# Altium PCB Sub_Unit_1st.PcbDoc
Units mil, origin at the board's own origin, x right, y up, seen from the top; angles counter-clockwise.
Board outline 2770 x 1670 mil, 2 copper layers (Top Layer, Bottom Layer); 43 components, 20 nets, 119 pads, 0 vias.
Unrouted connection lines stored in the file: 90.
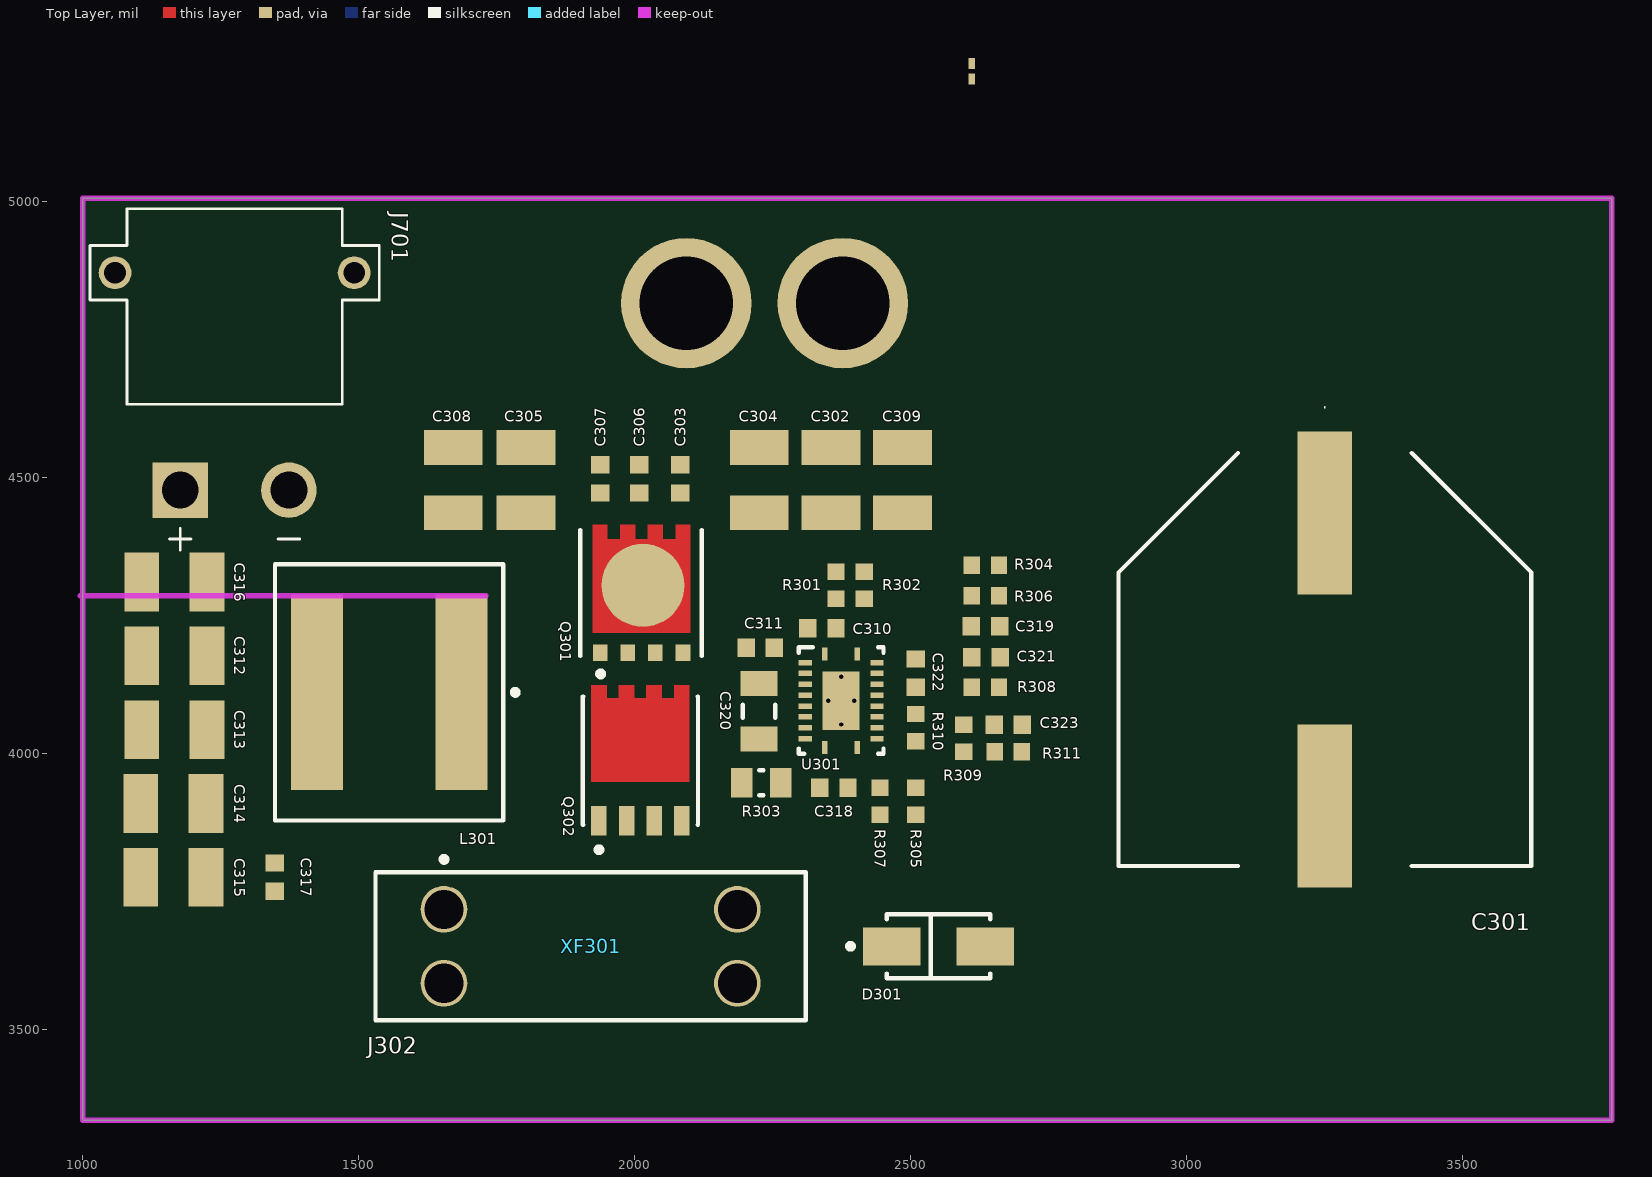
[diagram p0: Top Layer view]
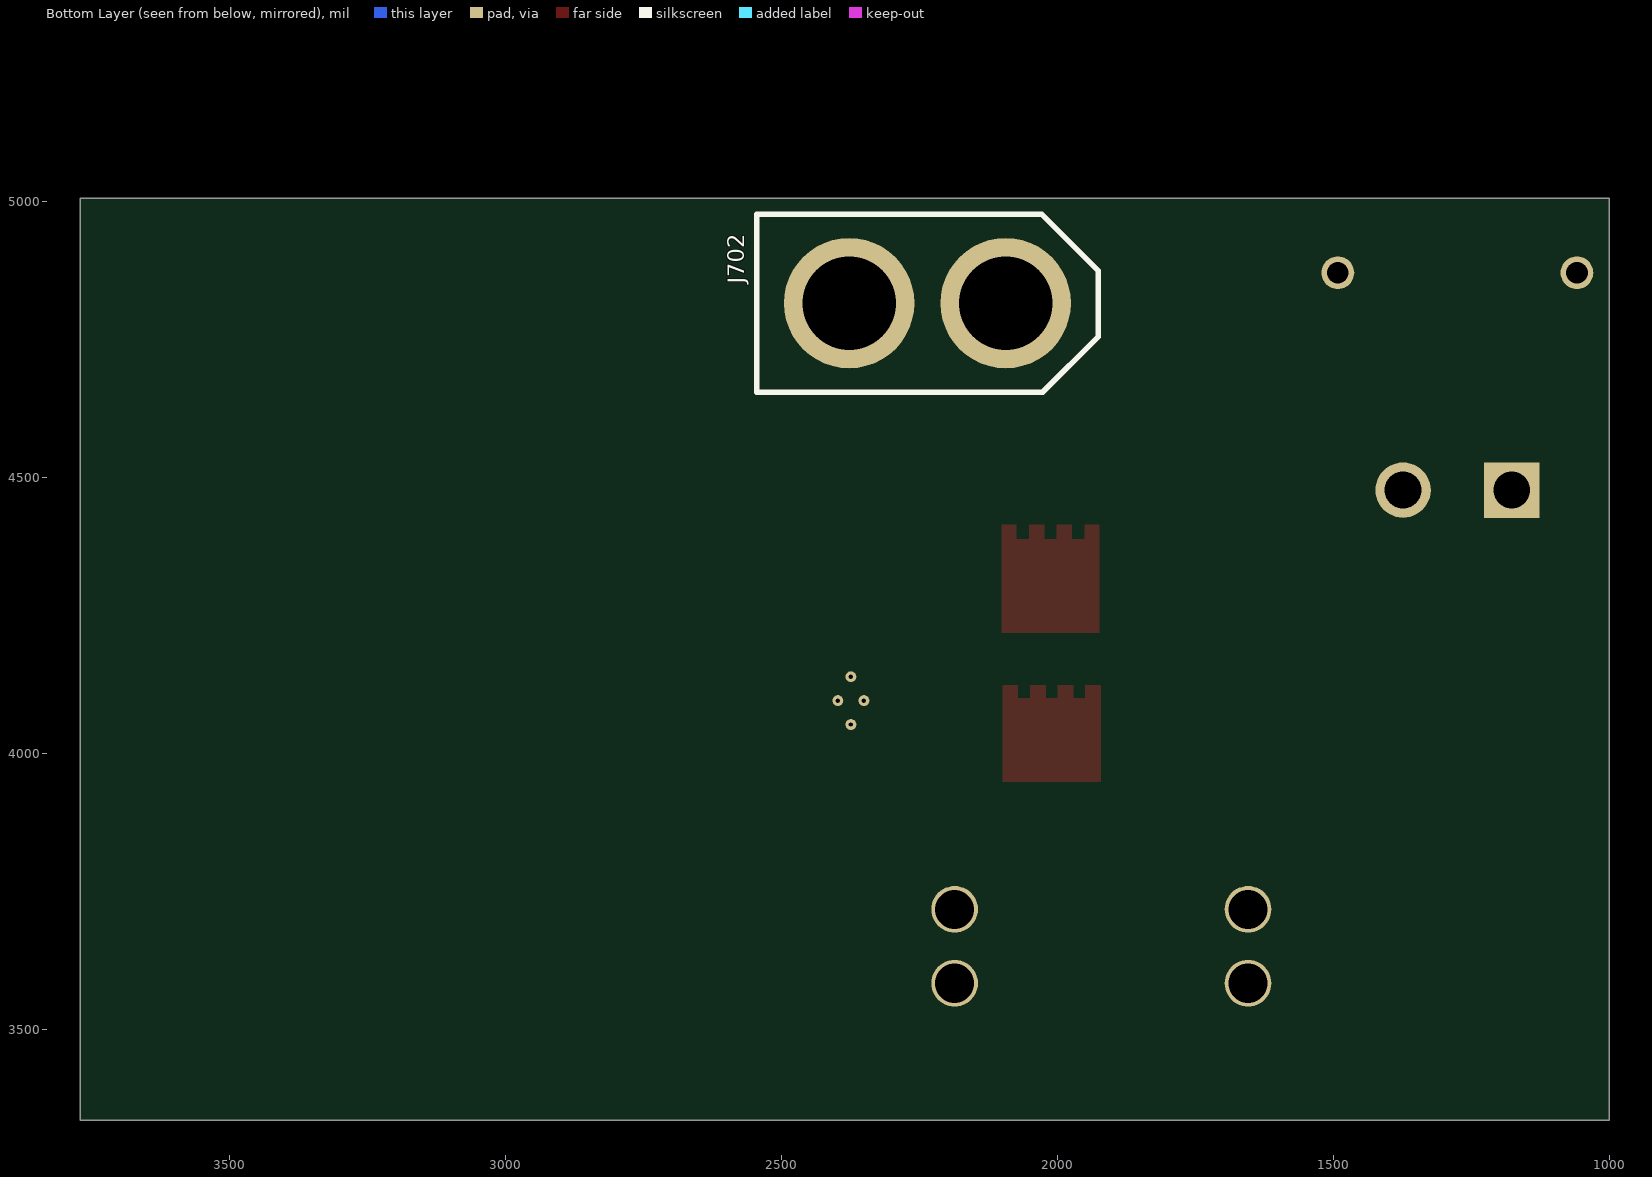
[diagram p1: Bottom Layer view, seen from below]

## Layer stack, top to bottom
Top Solder: solder mask 0.4, Solder Resist, Dk 3.5
Top Layer: signal copper 1.4
Dielectric 1: dielectric 12.6, FR-4, Dk 4.8
Bottom Layer: signal copper 1.4
Bottom Solder: solder mask 0.4, Solder Resist, Dk 3.5

## Board outline
1000,3335 3770,3335 3770,5005 1000,5005

## Design rules (kind name [scope] priority, off if disabled: settings)
Clearance [All] p1: gap=10 ignorepadtopadclearanceinfootprint=FALSE
PolygonConnect [All] p1: connectstyle=Relief reliefconductorwidth=10 reliefentries=4 polygonreliefangle="90 Angle" airgapwidth=10
RoutingVias [All] p1: holewidth=28 width=50 viastyle="Through Hole" minholewidth=28 minwidth=50 maxholewidth=28 maxwidth=50
SolderMaskExpansion [All] p1: expansion=4 istentingtop=FALSE
SupplyNets "Schematic Supply Nets_2" [InNet('PGND')] p1: voltage=0.000
SupplyNets "Schematic Supply Nets_1" [InNet('AGND')] p2: voltage=0.000
Width [All] p1: maxlimit=10 minlimit=10 preferedwidth=10
30 further rules are at their usual default settings.

## Classes and differential pairs
component class Connector: J701 J702

## Components (designator, comment, footprint, x,y, rotation, side; value= is the part's Value field where it differs from the comment)
C301 "220µF" EEEFK0J103SM 3250,4169.47 r270 top
C302 "non-polar_Capacitor" 1210 2355.28,4494.27 r270 top
C303 "non-polar_Capacitor" 0603#1 2082.66,4496.67 r270 top
C304 "non-polar_Capacitor" 1210 2225.28,4494.27 r270 top
C305 "non-polar_Capacitor" 1210 1802.8,4494.27 r270 top
C306 "non-polar_Capacitor" 0603#1 2007.66,4496.67 r270 top
C307 "non-polar_Capacitor" 0603#1 1937.66,4496.67 r270 top
C308 "non-polar_Capacitor" 1210 1670.91,4494.27 r270 top
C309 "non-polar_Capacitor" 1210 2484.96,4494.27 r270 top
C310 "non-polar_Capacitor" 0603#1 2338.86,4226.14 r180 top
C311 "non-polar_Capacitor" 0603#1 2227.09,4191.12 r180 top
C312 "non-polar_Capacitor" 1210 1165.94,4176.22 r0 top
C313 "non-polar_Capacitor" 1210 1165.94,4042.43 r0 top
C314 "non-polar_Capacitor" 1210 1164.06,3908.65 r0 top
C315 "non-polar_Capacitor" 1210 1164.06,3774.86 r0 top
C316 "non-polar_Capacitor" 1210 1165.94,4310 r0 top
C317 "non-polar_Capacitor" 0603#1 1347.86,3775.21 r90 top
C318 "non-polar_Capacitor" 0603#1 2360.51,3937.28 r180 top
C319 "non-polar_Capacitor" 0603#1 2635.16,4230 r0 top
C320 "non-polar_Capacitor" 1206 2225.08,4075.48 r90 top
C321 "non-polar_Capacitor" 0603#1 2636.14,4173.7 r0 top
C322 "non-polar_Capacitor" 0603#1 2509.02,4144.88 r90 top
C323 "non-polar_Capacitor" 0603#1 2676.3,4051.38 r0 top
D301 "SS14" FP-403AE-MFG 2550,3650 r180 top
J302 "2way" 2way_LP 2610,5235 r270 top net-tie
J701 "XT30PW-M" AMASS_XT30PW-M 1275,4870 r0 top
J702 "XT_60M" XT60_M 2235,4815 r0 bottom
L301 "XAL1010" FP-XAL1010-MFG 1555,4110 r180 top
Q301 "CSD19534Q5A" FP-DQJ0008A-MFG 2012.12,4290 r90 top
Q302 "CSD19532Q5B" FP-DNK0008A-MFG 2010,3986.34 r90 top
R301 "Resistor" 0603#2 2364.45,4303.87 r90 top
R302 "Resistor" 0603#2 2415.63,4303.87 r90 top
R303 "Resistor" 0805 2229.02,3946.14 r0 top
R304 "Resistor" 0603#2 2635.16,4340 r0 top
R305 "Resistor" 0603#2 2509.02,3912.68 r90 top
R306 "Resistor" 0603#2 2635.16,4285 r0 top
R307 "Resistor" 0603#2 2444.02,3912.68 r270 top
R308 "Resistor" 0603#2 2635.16,4119.29 r180 top
R309 "Resistor" 0603#2 2595.71,4026.77 r90 top
R310 "Resistor" 0603#2 2509.02,4046.15 r270 top
R311 "Resistor" 0603#2 2676.3,4002.17 r180 top
U301 "LM5146QRGYTQ1" RGY0020B 2373.62,4095 r0 top
XF301 "3557-2" KSTN-3557-2 1920,3650 r0 top

## Footprints (in the part's own frame and the unit in brackets; to place one, negate y for a bottom-side part, rotate by r counter-clockwise, add the part's x,y. Pads: shape width x height; smd on the part's side, far side on the other; paste and mask are expansions set on the pad)
2way_LP [mil] "2 way low power net tie junction"
  rrect5% 20x12 smd paste-100: 1(-14,0) 2(14,0)
0603#1 [mm]
  rect 0.8x0.85 smd: 1(-0.65,0) 2(0.65,0)
  body extent -0.85,-0.45 0.85,0.45, height 1
0603#2 [mm]
  rect 0.75x0.8 smd: 1(-0.625,0) 2(0.625,0)
  body extent -0.85,-0.45 0.85,0.45, height 0.55
0805 [mm] "SMD_Resistor"
  rect 1x1.35 smd: 1(-0.9,0) 2(0.9,0)
  silkscreen extent -0.1,-0.58 0.1,0.58, body extent -1.05,-0.67 1.05,0.67, height 0.55
1206 [mm]
  rect 1.15x1.7 smd: 1(-1.275,0) 2(1.275,0)
  silkscreen extent -0.3,-0.75 0.3,0.75, body extent -1.7,-0.9 1.7,0.9, height 1.8
1210 [mm]
  rect 1.6x2.7 smd: 1(-1.5,0) 2(1.5,0)
  body extent -1.75,-1.4 1.75,1.4, height 2.8
AMASS_XT30PW-M [mm]
  round 2.55 hole 1.7: N(2.5,-10)
  rect 2.55x2.55 / inner round 2.55 / far side rect 2.55x2.55 hole 1.7: P(-2.5,-10)
  round 1.508 hole 1: S1(5.5,0) S2(-5.5,0)
  silkscreen extent -6.65,-12.75 6.65,2.95, body extent -6.65,-11 6.65,2.95, height 5
EEEFK0J103SM [mm]
  rect 7.5x2.5 smd: 1(-6.75,0) 2(6.75,0)
  silkscreen extent -11.63,-9.5 9.5,9.5, body extent -10.2,-9.5 10.2,9.5, height 16.5
FP-403AE-MFG [mm]
  rect 2.65x1.75 smd paste+0 mask+0: 1(-2.15,0) 2(2.15,0)
  silkscreen extent -2.37,-1.48 4.17,1.48, body extent -2.6,-1.36 2.6,1.36, height 2.5
FP-DNK0008A-MFG [mm]
  rect 1.372x0.71 smd paste-1000 mask+0: 1(-2.77,1.905) 2(-2.77,0.635) 3(-2.77,-0.635) 4(-2.77,-1.905)
  round 0.025 smd paste-2.22: 5-6-7-8(1.236,0)
  Top Layer region: -0.984,-2.26 3.456,-2.26 3.456,-1.55 2.866,-1.55 2.866,-0.99 3.456,-0.99 3.456,-0.28 2.866,-0.28 2.866,0.28 3.456,0.28 3.456,0.99 2.866,0.99 2.866,1.55 3.456,1.55 3.456,2.26 -0.984,2.26
  silkscreen extent -4.22,-2.65 2.95,2.65, body extent -3,-2.5 3,2.5, height 1.05
FP-DQJ0008A-MFG [mm]
  rect 0.75x0.675 smd paste-1000 mask+0: 1(-2.752,1.905) 2(-2.752,0.635) 3(-2.752,-0.635) 4(-2.752,-1.905)
  round 3.821 smd paste-1000 mask+0: 5-6-7-8(0.35,-0.07)
  Top Layer region: -1.823,2.242 3.127,2.242 3.127,1.568 2.472,1.568 2.472,0.972 3.127,0.972 3.127,0.298 2.472,0.298 2.472,-0.298 3.127,-0.298 3.127,-0.972 2.472,-0.972 2.472,-1.568 3.127,-1.568 3.127,-2.242 -1.823,-2.242 -1.823,2.242
  silkscreen extent -3.85,-2.78 2.9,2.82, body extent -3,-2.7 3,2.7, height 1.07
FP-XAL1010-MFG [mm]
  rect 2.38x9 smd paste+0 mask+0: 1(-3.325,0) 2(3.325,0)
  silkscreen extent -5.93,-5.9 5.25,5.9, body extent -5,-5.65 5,5.65, height 10.01
KSTN-3557-2 [mm] "Fuse Holder, PCB Mount, Thru-Hole, Body 19.8x6.8mm, Height 7.4mm"
  round 2.15 hole 1.8: 1(-6.75,1.7) 2(-6.75,-1.7) 3(6.75,1.7) 4(6.75,-1.7)
  silkscreen extent -9.9,-3.4 9.9,4.12, body extent -9.91,-3.37 9.91,3.37, height 7.74
RGY0020B [mm]
  rect 0.25x0.6 smd paste+0 mask+0: 1(-0.75,2.15) 10(-0.75,-2.15) 11(0.75,-2.15) 20(0.75,2.15)
  rect 0.6x0.25 smd paste+0 mask+0: 2(-1.65,1.75) 3(-1.65,1.25) 4(-1.65,0.75) 5(-1.65,0.25) 6(-1.65,-0.25) 7(-1.65,-0.75) 8(-1.65,-1.25) 9(-1.65,-1.75) 12(1.65,-1.75) 13(1.65,-1.25) 14(1.65,-0.75) 15(1.65,-0.25) 16(1.65,0.25) 17(1.65,0.75) 18(1.65,1.25) 19(1.65,1.75)
  rect 1.7x2.7 smd paste-1.337 mask+0: 21(0,0)
  round 0.5 hole 0.203 paste-2539.97 mask+0: V(-0.6,0) V(0,-1.1) V(0,1.1) V(0.6,0)
  silkscreen extent -1.95,-2.45 1.95,2.45
XT60_M [mm]
  round 6 hole 4.3: 1(-3.6,0) 2(3.6,0)
  silkscreen extent -7.85,-4.1 7.85,4.1, body extent -7.8,-4 7.8,4, height 16.4

## Part data
C301: library part EEV-FK2A221M, "Capacitor Polarised", Manufacturer_Name=Panasonic, Mouser Part Number=667-EEV-FK2A221M, Arrow Part Number=EEV-FK2A221M, Arrow Price/Stock=https://www.arrow.com/en/products/eevfk2a221m/panasonic?utm_currency=USD&region=nac, Datasheet Link=http://industrial.panasonic.com/cdbs/www-data/pdf/RDE0000/ABA0000C1181.pdf, Height=17mm, Manufacturer_Part_Number=EEV-FK2A221M, Mouser Price/Stock=https://www.mouser.co.uk/ProductDetail/Panasonic/EEV-FK2A221M?qs=f%252BPvLx1Hi0lum2kXFW5X7Q%3D%3D
C302: library part CMP-024-000020-16, "SMD type ceramic capacitor", Capacitance=4.7µF, Voltage=100V, Design Item ID=Capacitor, Source=robit_passive.SchLib
C303 C317: library part CMP-024-000020-16, "SMD type ceramic capacitor", Capacitance=100nF, Voltage=100V, Design Item ID=Capacitor, Source=robit_passive.SchLib
C304 C305 C306 C308 C309 C320: library part CMP-024-000020-16, "SMD type ceramic capacitor", Capacitance=2.2µF, Voltage=50V, Design Item ID=Capacitor, Source=robit_passive.SchLib
C307 C310 C311: library part CMP-024-000020-16, "SMD type ceramic capacitor", Capacitance=100nF, Voltage=50V, Design Item ID=Capacitor, Source=robit_passive.SchLib
C312 C313 C314 C315 C316: library part CMP-024-000020-16, "SMD type ceramic capacitor", Capacitance=22µF, Voltage=50V, Design Item ID=Capacitor, Source=robit_passive.SchLib
C318: library part CMP-024-000020-16, "SMD type ceramic capacitor", Capacitance=15pF, Voltage=50V, Design Item ID=Capacitor, Source=robit_passive.SchLib
C319: library part CMP-024-000020-16, "SMD type ceramic capacitor", Capacitance=56nF, Voltage=50V, Design Item ID=Capacitor, Source=robit_passive.SchLib
C321: library part CMP-024-000020-16, "SMD type ceramic capacitor", Capacitance=4.7nF, Voltage=50V, Design Item ID=Capacitor, Source=robit_passive.SchLib
C322: library part CMP-024-000020-16, "SMD type ceramic capacitor", Capacitance=330pF, Voltage=50V, Design Item ID=Capacitor, Source=robit_passive.SchLib
C323: library part CMP-024-000020-16, "SMD type ceramic capacitor", Capacitance=470pF, Voltage=50V, Design Item ID=Capacitor, Source=robit_passive.SchLib
D301: library part CMP-2000-04943-2, "DIODE SCHOTTKY 40V 1A SMA", Forward Current=1A, Manufacturer="ON Semiconductor", Max Junction Temp=+125°C, Max Repetitive Reverse Voltage=40V, Max Surge Forward Current=40A, Package=403AE, Peak Reverse Current=0.2mA, Temperature="-65°C to +125°C", Temperature Range Low=-65°C, Automotive=No, Category=Diode, ComponentLink2Description=Datasheet, ComponentLink2URL=https://www.onsemi.com/pub/Collateral/SS19-D.PDF, Device Class L1="Discrete Semiconductors", Device Class L2=Diodes, Device Class L3="Schottky Diodes", Digikey Description="DIODE SCHOTTKY 40V 1A SMA", Height=2.5mm, Lead Free=Yes, Manufacturer Part Number=SS14, Mouser Description="Schottky Diodes & Rectifiers SMA 40V 1.0A", Octopart=https://octopart.com/ss14-on+semiconductor-29205033, RoHS=TRUE, Standoff Height=0.05mm, Temperature Range High=+125°C
J302: library part CMP-187-000000-1, "2 way net tie junction", Component Type="Net Tie", ComponentLink1Description=Source, ComponentLink1URL=http://www.edatools.cz/addons, Design Item ID=2way, FootprintNote="LP=12mil, MP=40mil, HP=120mil", Pin Count=2, Source=NetTie.SchLib
J701: library part CMP-019-000079-2, "Socket; DC supply; XT30; male; PIN: 2; on PCBs; THT; Colour: yellow", Package=None, Check_prices=https://www.snapeda.com/parts/XT30PW-M/AMASS/view-part/?ref=eda, Component Type=Standard, Design Item ID=XT30PW-M, MF=AMASS, MP=XT30PW-M, Pin Count=2, SnapEDA_Link=https://www.snapeda.com/parts/XT30PW-M/AMASS/view-part/?ref=snap, Source=XT30PW-M.SchLib, System=Connector
J702: library part CMP-019-000042-2, "XT_60 Connector MALE", Design Item ID=XT_60M, Source=robit_connector.SchLib, System=Connector
L301: library part CMP-028-000007-1, "General Purpose Inductor, 5.6uH, 20%, 1 Element, Composite-Core, SMD, 4539", Inductance=6.8µH
Q301: library part CMP-04962-000018-1, "MOSFET N-CH 100V 50 8SON", Continuous Drain Current=10A, Drain to Source Breakdown Voltage=100V, Drain to Source Resistance=12.6mΩ, Gate To Source Voltage=20V, Input Capacitace At Vds="1290pF @ 50V", Manufacturer="Texas Instruments", Max Forward Diode Voltage=1V, Max Junction Temp=+150°C, Package=DQJ0008A, Power Dissipation=3.2W, Pulse Drain Current=137A, Temperature="-55°C to +150°C", Temperature Range Low=-55°C, Typ Forward Diode Voltage=0.8V, Automotive=No, Category=Trans, ComponentLink2Description=Datasheet, ComponentLink2URL=http://www.ti.com/lit/ds/symlink/csd19534q5a.pdf, Depletion Mode=False, Device Class L1="Discrete Semiconductors", Device Class L2=Transistors, Device Class L3=MOSFETs, Digikey Description="MOSFET N-CH 100V 50 8SON", Drain To Source Voltage=100V, Gate Charge At Vgs="17nC @ 10V", Height=1.1mm, Lead Free=Yes, Manufacturer Part Number=CSD19534Q5A, Mouser Description="MOSFET N-Channel MOSFET", Number of Channels=1, Number Of N Channels=1, Octopart=https://octopart.com/csd19534q5a-texas+instruments-46749514, Reverse Recovery Charge=134nC, Reverse Recovery Time=53ns, RoHS=TRUE, Rthja Max=50°C/W, Temperature Range High=+150°C, Threshold Vgs Max=3.4V, Threshold Vgs Min=2.4V, Transconductance=47S, Turn Off Delay Time=20ns, Turn On Delay Time=9ns
Q302: library part CMP-00003-1, "100-V, N channel NexFET™ power MOSFET, single SON 5 mm x 6 mm, 4.9 mOhm 8-VSON-CLIP -55 to 150", Continuous Drain Current (ID)=100A, Drain to Source Breakdown Voltage=100V, Drain to Source Resistance=4.6mΩ, Gate to Source Voltage (Vgs)=20V, Input Capacitance=4.81nF, Manufacturer Lifecycle Status=ACTIVE, Max Junction Temperature (Tj)=150°C, Max Power Dissipation=3.1W, Min Operating Temperature=-55°C, Threshold Voltage=2.6V, Contact Plating=Tin, Drain to Source Voltage (Vdss)=100V, Element Configuration=Single, Fall Time=6ns, Height=0m, Lead Free="Contains Lead", Length=5mm, Lifecycle Status=Production, Max Operating Temperature=150°C, Mounting Technology="Surface Mount", Number of Channels=1, Number of Elements=1, Packaging=Digi-Reel®, Pins=8, Power Dissipation=3.1W, Rds On Max=4.9mΩ, REACH SVHC=No, Rise Time=6ns, RoHS=Compliant, Schedule B="8541290080, 8541290080", Thickness=950µm, Turn-Off Delay Time=22ns, Turn-On Delay Time=7ns, Width=5mm
R301: library part CMP-029-000004-8, "SMD type resistor", Resistance=2.1, Design Item ID=Resistor, Source=robit_passive.SchLib
R302: library part CMP-029-000004-8, "SMD type resistor", Resistance=200k, Design Item ID=Resistor, Source=robit_passive.SchLib
R303: library part CMP-029-000004-8, "SMD type resistor", Resistance=442, Design Item ID=Resistor, Source=robit_passive.SchLib
R304: library part CMP-029-000004-8, "SMD type resistor", Resistance=7.32k, Design Item ID=Resistor, Source=robit_passive.SchLib
R305: library part CMP-029-000004-8, "SMD type resistor", Resistance=0, Design Item ID=Resistor, Source=robit_passive.SchLib
R306: library part CMP-029-000004-8, "SMD type resistor", Resistance=24.9k, Design Item ID=Resistor, Source=robit_passive.SchLib
R307: library part CMP-029-000004-8, "SMD type resistor", Resistance=20k, Design Item ID=Resistor, Source=robit_passive.SchLib
R308: library part CMP-029-000004-8, "SMD type resistor", Resistance=2.67k, Design Item ID=Resistor, Source=robit_passive.SchLib
R309: library part CMP-029-000004-8, "SMD type resistor", Resistance=17.8k, Design Item ID=Resistor, Source=robit_passive.SchLib
R310: library part CMP-029-000004-8, "SMD type resistor", Resistance=1.27k, Design Item ID=Resistor, Source=robit_passive.SchLib
R311: library part CMP-029-000004-8, "SMD type resistor", Resistance=48.7, Design Item ID=Resistor, Source=robit_passive.SchLib
U301: "Automotive 100-V synchronous buck DC/DC controller with wide duty-cycle range 20-VQFN -40 to 150", Manufacturer_Name="Texas Instruments", Copyright="Copyright (C) 2026 Ultra Librarian. All rights reserved.", Manufacturer_Part_Number=LM5146QRGYTQ1, RefDes=RefDes, Type=TYPE
XF301: library part CMP-2000-05461-1, "FUSE HOLDER, PCB MOUNT, 500VAC, 20A, ROHS", Current Rating=30A, Manufacturer=Keystone-Electronics, Voltage=500V, Category=CircuitProtection, Contact Finish=TinNickel, Contact Material=Brass, Datasheet URL=http://datasheet.octopart.com/3557-2-Keystone-datasheet-15715937.pdf, Datasheet Version=Apr-13, Family=Fuseholders, For Use With/Related Products=ATC,ATO257,MINI897, Fuse Size="0.43\"Lx0.15\"Wx0.64\"H(10.92mmx3.81mmx16.25mm)", Fuse Type=Blade, Fuseholder Type=Block, Manufacturer URL=http://www.keyelco.com/, Mounting Type=PCB, Number of Circuits=1, Orientation=Vertical, Series=-, Termination Style=PCPin

## Nets (pads, with @x,y where several pads share a name; then routed paths per layer and width w, separated by ;. In a path a pad name is that pad's centre, name@x,y a point inside that pad or via, vN(x,y) a via of type N, cw(c..) or ccw(c..) an arc to the next point about the centre after c; other vN are vias at no path point)
12V_OUT: C312.2 C313.2 C314.2 C315.2 C316.2 C317.2 D301.1 J701.P L301.2 R309.1 R311.1 XF301.1 XF301.2 XF301.3 XF301.4
AGND: C319.1 J302.2 R304.1 R306.1 R310.2 U301.6
BST: C311.2 U301.17
COMP: C321.2 C322.2 U301.4
EN_UVLO: R302.1 R304.2 U301.1
FB: C322.1 C323.2 R308.1 R309.2 R310.1 U301.5
HO: Q301.4 U301.18
ILIM: C318.1 R303.1 U301.11
LM5146_VCC: C320.2 D301.2 R307.2 U301.14
LO: Q302.4 U301.13
NetC321_1: C321.1 R308.2
NetC323_1: C323.1 R311.2
PGND: C301.2 C302.1 C303.1 C304.1 C305.1 C306.1 C307.1 C308.1 C309.1 C310.1 C312.1 C313.1 C314.1 C315.1 C316.1 C317.1 C318.2 C320.1 J302.1 J701.N J702.1 Q302.1 Q302.2 Q302.3 R305.1 U301.12 U301.15 U301.21
PGOOD: R307.1 U301.10
PROTECT_IN: C301.1 C302.2 C303.2 C304.2 C305.2 C306.2 C307.2 C308.2 C309.2 J702.2 Q301.5-6-7-8 R301.2 R302.2
RT: R306.2 U301.2
SS_TRK: C319.2 U301.3
SW: C311.1 L301.1 Q301.1 Q301.2 Q301.3 Q302.5-6-7-8 R303.2 U301.19
SYNCIN: R305.2 U301.8
VIN: C310.2 R301.1 U301.20
pads on no net: J701.S1 J701.S2 U301.7 U301.9 U301.16 U301.V

## Keep-outs
Top Layer:
  lines w10: 995,4285 1730,4285 ; 1000,3335 3770,3335 3770,5005 1000,5005 1000,3335